# Altium PCB usbserial.PcbDoc
Units mm, origin at the board's own origin, x right, y up, seen from the top; angles counter-clockwise.
Board outline 12 x 23.27 mm, 2 copper layers (Top Layer, Bottom Layer); 7 components, 9 nets, 27 pads, 14 vias.
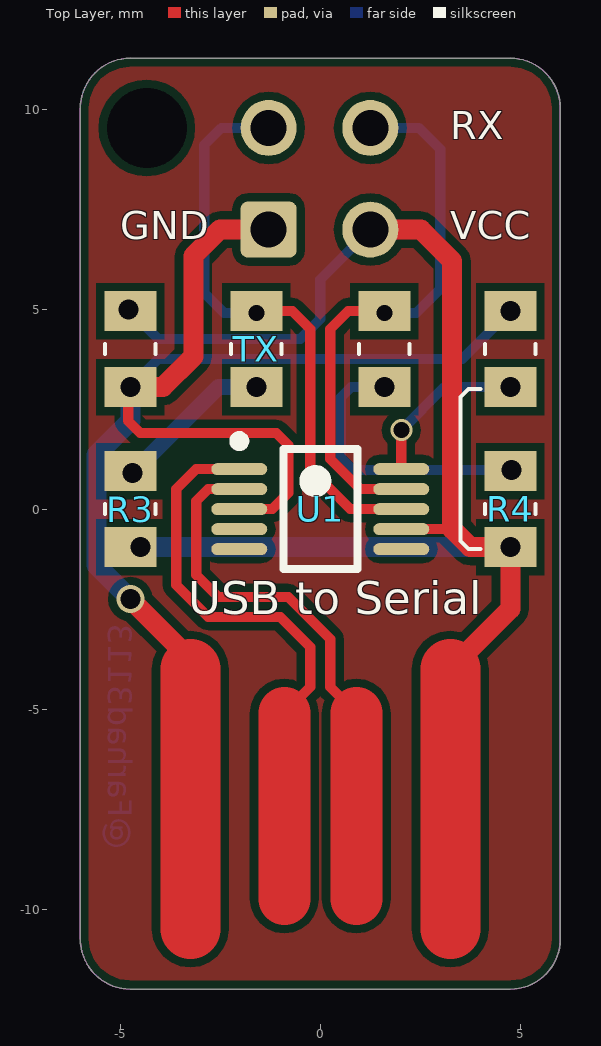
[diagram p0: Top Layer view]
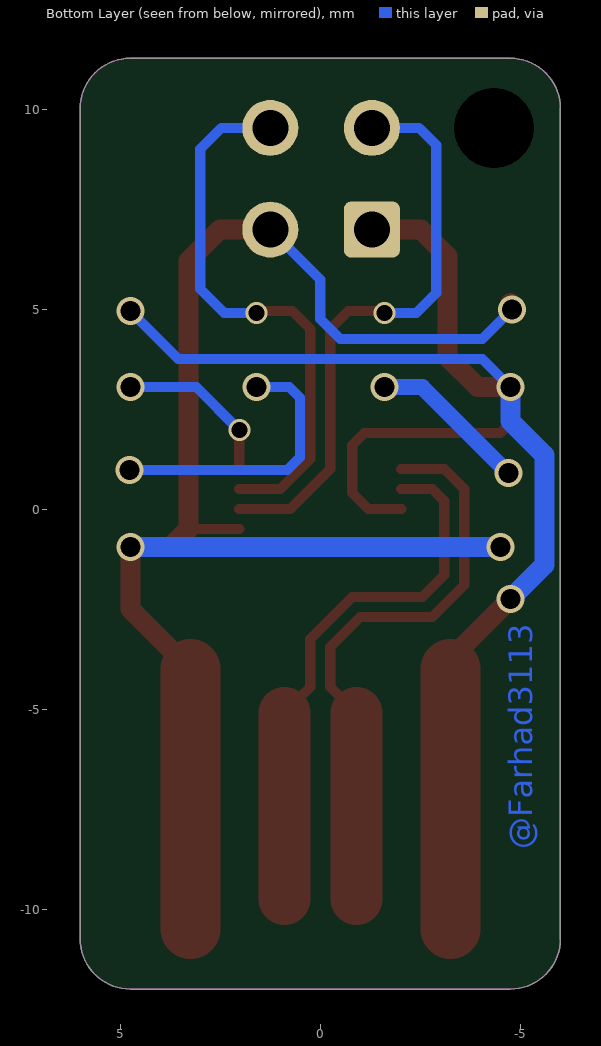
[diagram p1: Bottom Layer view, seen from below]
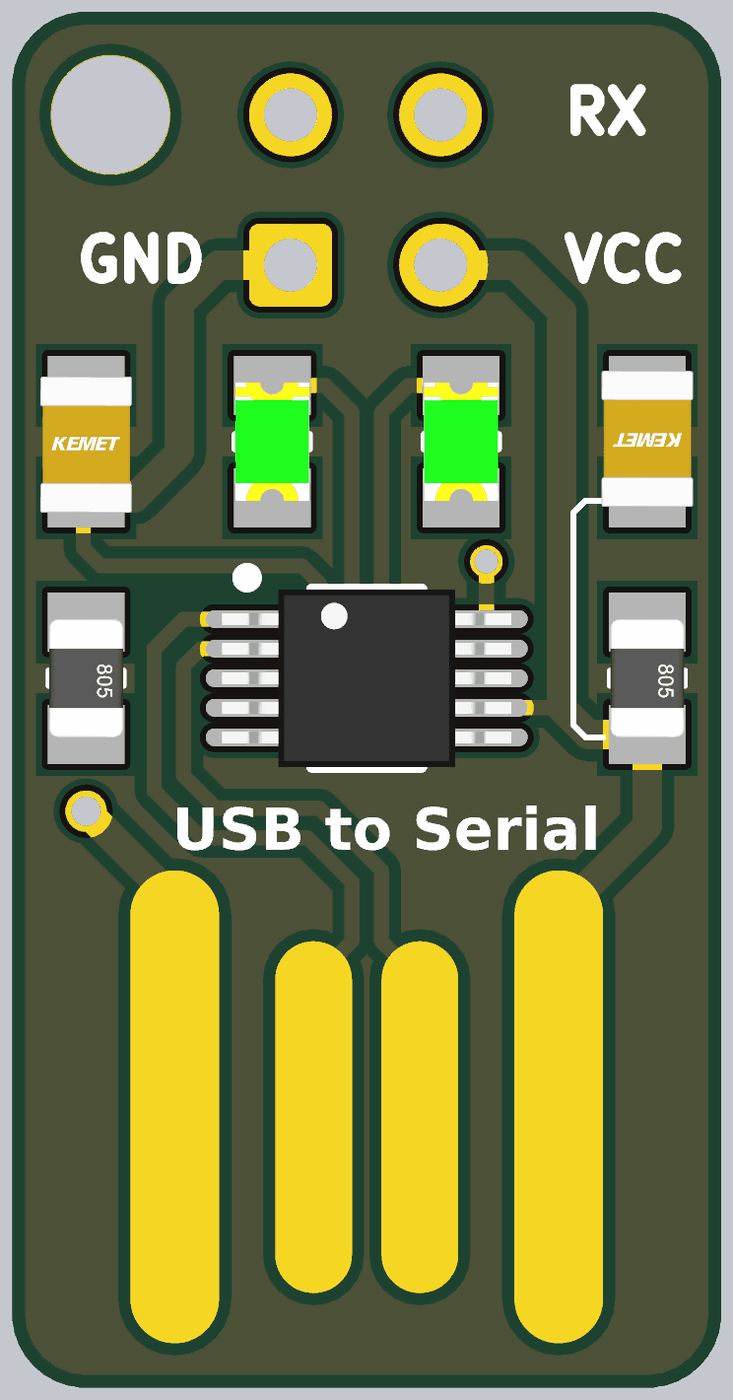
[diagram p2: 3D render of the assembled board from above, using the file's embedded part models]

## Layer stack, top to bottom
Top Solder: solder mask 0.0102, Solder Resist, Dk 3.5
Top Layer: signal copper 0.0356
Dielectric 1: dielectric 0.32, FR-4, Dk 4.8
Bottom Layer: signal copper 0.0356
Bottom Solder: solder mask 0.0102, Solder Resist, Dk 3.5

## Board outline
-6,-10.75 ccw(c-4.75,-10.75) -4.75,-12 4.75,-12 ccw(c4.75,-10.75) 6,-10.75 6,10.02 ccw(c4.75,10.02) 4.75,11.27 -4.75,11.27 ccw(c-4.75,10.02) -6,10.02

## Design rules (kind name [scope] priority, off if disabled: settings)
Clearance "MCU Clearance" [All] p1: gap=0.025 ignorepadtopadclearanceinfootprint=FALSE except(0.2: Arc-Fill Arc-Poly Arc-Region Track-Fill Track-Poly Track-Region SMDPad-Fill SMDPad-Poly SMDPad-Region THPad-Fill THPad-Poly THPad-Region Via-Fill Via-Poly Via-Region Fill-Fill Fill-Poly Fill-Region Poly-Poly Poly-Region Region-Region)
PolygonConnect [All] p1: connectstyle=Relief reliefconductorwidth=0.254 reliefentries=4 polygonreliefangle="90 Angle" airgapwidth=0.254
RoutingVias [All] p1: holewidth=0.711 width=1.27 viastyle="Through Hole" minholewidth=0.711 minwidth=1.27 maxholewidth=0.711 maxwidth=1.27
SolderMaskExpansion [All] p1: expansion=0.102
Width [All] p1: maxlimit=10 minlimit=0.254 preferedwidth=0.254
30 further rules are at their usual default settings.

## Components (designator, comment, footprint, x,y, rotation, side; value= is the part's Value field where it differs from the comment)
GND "Cap Pol2" "cap 0805" 4.75,4 r90 top value=100nF (schematic designator C1)
R3 "Res3" "res 0805" -4.75,0 r270 top value=1K
R4 "Res3" "res 0805" 4.75,0 r270 top value=1K
RX "LED2" 0805 1.6,4 r90 top (schematic designator D2)
TX "LED2" 0805 -1.6,4 r90 top (schematic designator D1)
U1 "CH340E" CH340E 0,0 r0 top
VCC "Cap Pol2" "cap 0805" -4.75,4 r270 top value=100nF (schematic designator C2)

## Footprints (in the part's own frame and the unit in brackets; to place one, negate y for a bottom-side part, rotate by r counter-clockwise, add the part's x,y. Pads: shape width x height; smd on the part's side, far side on the other; paste and mask are expansions set on the pad)
0805 [mm] "0805"
  rect 1x1.3 smd: 1(-0.95,0) 2(0.95,0)
  silkscreen extent -0.13,-0.64 0.13,0.64, body extent -1,-0.62 1,0.63, height 1.1
"cap 0805" [mm] "0805 - with 3d model"
  rect 1x1.3 smd: 1(-0.95,0) 2(0.95,0)
  silkscreen extent -0.13,-0.64 0.13,0.64, body extent -1.1,-0.78 1.2,0.78, height 1
CH340E [mm] "MSOP-10 - with 3d model"
  oval 1.4x0.3 smd: 1(-2.025,1) 2(-2.025,0.5) 3(-2.025,0) 4(-2.025,-0.5) 5(-2.025,-1) 6(2.025,-1) 7(2.025,-0.5) 8(2.025,0) 9(2.025,0.5) 10(2.025,1)
  silkscreen extent -2.15,-1.5 0.92,1.82, body extent -2.45,-1.5 2.45,1.5, height 1.25
"res 0805" [mm] "0805 - with 3d model"
  rect 1x1.3 smd: 1(-0.95,0) 2(0.95,0)
  silkscreen extent -0.13,-0.64 0.13,0.64, body extent -1,-0.62 1,0.63, height 0.78

## Part data
GND VCC: "Polarized Capacitor (Axial)", LatestRevisionDate=17-Jul-2002, LatestRevisionNote="Re-released for DXP Platform.", PackageDescription="Polarized Capacitor; 2 Leads", PackageReference=POLAR0.8, Published=8-Jun-2000, Publisher="Altium Limited"
R3 R4: "Resistor", LatestRevisionDate=29-May-2009, LatestRevisionNote="IPC-7351 Footprint Added.", PackageDescription="Chip Resistor", PackageReference=J1-0603, Published=8-Jun-2000, Publisher="Altium Limited"
RX TX: "Typical RED, GREEN, YELLOW, AMBER GaAs LED", LatestRevisionDate=17-Jul-2002, LatestRevisionNote="Re-released for DXP Platform.", PackageDescription="SM LED; 2 Flat Leads", PackageReference=3.2X1.6X1.1, PackageVersion=Feb-2002, Published=8-Jun-2000, Publisher="Altium Limited"
U1: "TTL IC"

## Free pads (board coordinates)
  round 1.5 hole 2: ""(-4.338,9.528)
  rrect25% 1.4x1.4 hole 0.9: ""(-1.29,6.988)
  rrect100% 1.4x1.4 hole 0.9: ""(-1.29,9.528) ""(1.25,6.988) ""(1.25,9.528)

## Via types
v1: diameter 0.7, hole 0.5, Top Layer to Bottom Layer, 11 vias
v2: diameter 0.55, hole 0.4, Top Layer to Bottom Layer, 3 vias

## Nets (pads, with @x,y where several pads share a name; then routed paths per layer and width w, separated by ;. In a path a pad name is that pad's centre, name@x,y a point inside that pad or via, vN(x,y) a via of type N, cw(c..) or ccw(c..) an arc to the next point about the centre after c; other vN are vias at no path point)
D+: U1.1 | length 14.7
  Top Layer w0.254: U1.1 -3.1,1 -3.6,0.5 -3.6,-1.9 -2.8,-2.7 -1,-2.7 -0.25,-3.45 -0.25,-4.45 -0.9,-5.1
  Top Layer w1.3: -0.9,-9.75 -0.9,-5.1
D-: U1.2 | length 13.8
  Top Layer w0.254: U1.2 -2.8,0.5 -3.1,0.2 -3.1,-1.65 -2.55,-2.2 -0.8,-2.2 0.25,-3.25 0.25,-4.45 0.9,-5.1
  Top Layer w1.3: 0.9,-9.75 0.9,-5.1
GND: GND.2 pad.@-1.29,6.988 U1.3 VCC.2 | length 39.1
  Top Layer w0.254: VCC.2@-4.8,2.75 -4.8,2.2 -4.5,1.9 -1.1,1.9 -0.8,1.6 -0.8,0.4 -1.2,0 U1.3
  Top Layer w0.4: -3.25,-4 -3.25,-3.75
  Top Layer w0.5: v1(-4.75,-2.25) -3.25,-3.75 ; v1(-4.75,3.05) -3.935,3.05 -3.175,3.81 -3.175,6.325 -2.512,6.988 pad.@-1.29,6.988
  Top Layer w1.5: -3.25,-10.5 -3.25,-4
  Bottom Layer w0.254: v1(-4.75,3.05) -4.05,3.75 3.55,3.75 v1(4.75,4.95)
  Bottom Layer w0.5: v1(-4.75,-2.25) -5.6,-1.4 -5.6,1.35 -4.75,2.2 v1(-4.75,3.05)
NetC1_1: GND.1 U1.10 | length 4.1
  Top Layer w0.254: U1.10 v2(2.025,1.973)
  Bottom Layer w0.254: v2(2.025,1.973) 3.102,3.05 v1(4.75,3.05)
NetD1_1: R3.1 TX.1 | length 4
  Bottom Layer w0.4: v1(-4.7,0.9) -2.55,3.05 v1(-1.6,3.05)
NetD1_2: pad.@-1.29,9.528 TX.2 U1.8 | length 14.6
  Top Layer w0.254: TX.2@-1.5,4.95 -0.7,4.95 -0.25,4.5 -0.25,1 0.75,0 U1.8
  Bottom Layer w0.254: v2(-1.6,4.9) -2.4,4.9 -2.9,5.4 -2.9,9.1 -2.472,9.528 pad.@-1.29,9.528
NetD2_1: R4.1 RX.1 | length 7.1
  Bottom Layer w0.254: v1(1.6,3.05) 0.772,3.05 0.51,2.788 0.51,1.288 0.823,0.975 v1(4.775,0.975)
NetD2_2: pad.@1.25,9.528 RX.2 U1.9 | length 13.9
  Top Layer w0.254: RX.2@1.5,4.95 0.7,4.95 0.25,4.5 0.25,1.25 1,0.5 U1.9
  Bottom Layer w0.254: pad.@1.25,9.528 2.472,9.528 3,9 3,5.5 2.4,4.9 v2(1.6,4.9)
VCC: pad.@1.25,6.988 R3.2 R4.2 U1.7 VCC.1 | length 40.1
  Top Layer w0.254: U1.7 3.298,-0.5 ; 3.748,-0.95 3.798,-1 R4.2@4.45,-1
  Top Layer w0.5: VCC.1 VCC.1@-4.75,5.15 ; pad.@1.25,6.988 2.512,6.988 3.298,6.202 3.298,-0.5 ; 3.25,-4 4.75,-2.5 R4.2@4.75,-1.25 ; 3.31,-0.512 3.748,-0.95 v1(4.75,-0.95)
  Top Layer w1.5: 3.25,-10.5 3.25,-4
  Bottom Layer w0.254: v1(-4.79,4.988) -4.052,4.25 -0.5,4.25 0,4.75 0,5.738 pad.@1.25,6.988
  Bottom Layer w0.5: v1(-4.5,-0.95) v1(4.75,-0.95)
pads on no net: U1.4 U1.5 U1.6

## Polygon pours and split planes (outlines as drawn)
no net on Top Layer "AutoNaming" (solid, pour order 0): 6,11.25 -6,11.25 -6,-12 6,-12

## Keep-outs
Keep-Out Layer:
  the board outline again, w0.025

## Other copper
Bottom Layer:
  text "@Farhad3113" at -5.5,-8.5 h1 r270

## Silkscreen, mask and mechanical layers (free items; w line width, h text height)
Top Overlay:
  lines w0.1: 4,-1 3.7,-1 3.5,-0.8 3.5,-0.4 3.5,2.8 3.7,3 4,3
  text "USB to Serial" at -3.3,-2.9 h1.4
Top Solder:
  lines w1.3: -0.9,-9.75 -0.9,-5.1 ; 0.9,-9.75 0.9,-5.1
  lines w1.5: -3.25,-10.5 -3.25,-4 ; 3.25,-10.5 3.25,-4